# Altium PCB P1_SELF_GD303 V1.1.PcbDoc (part 2 of 2)
Units mm, origin at the board's own origin, x right, y up, seen from the top; angles counter-clockwise.
Board outline 113.1 x 59.11 mm, 2 copper layers (Top layer, Bottom layer), stack 1.171 mm thick; 160 components, 103 nets, 482 pads, 705 vias.
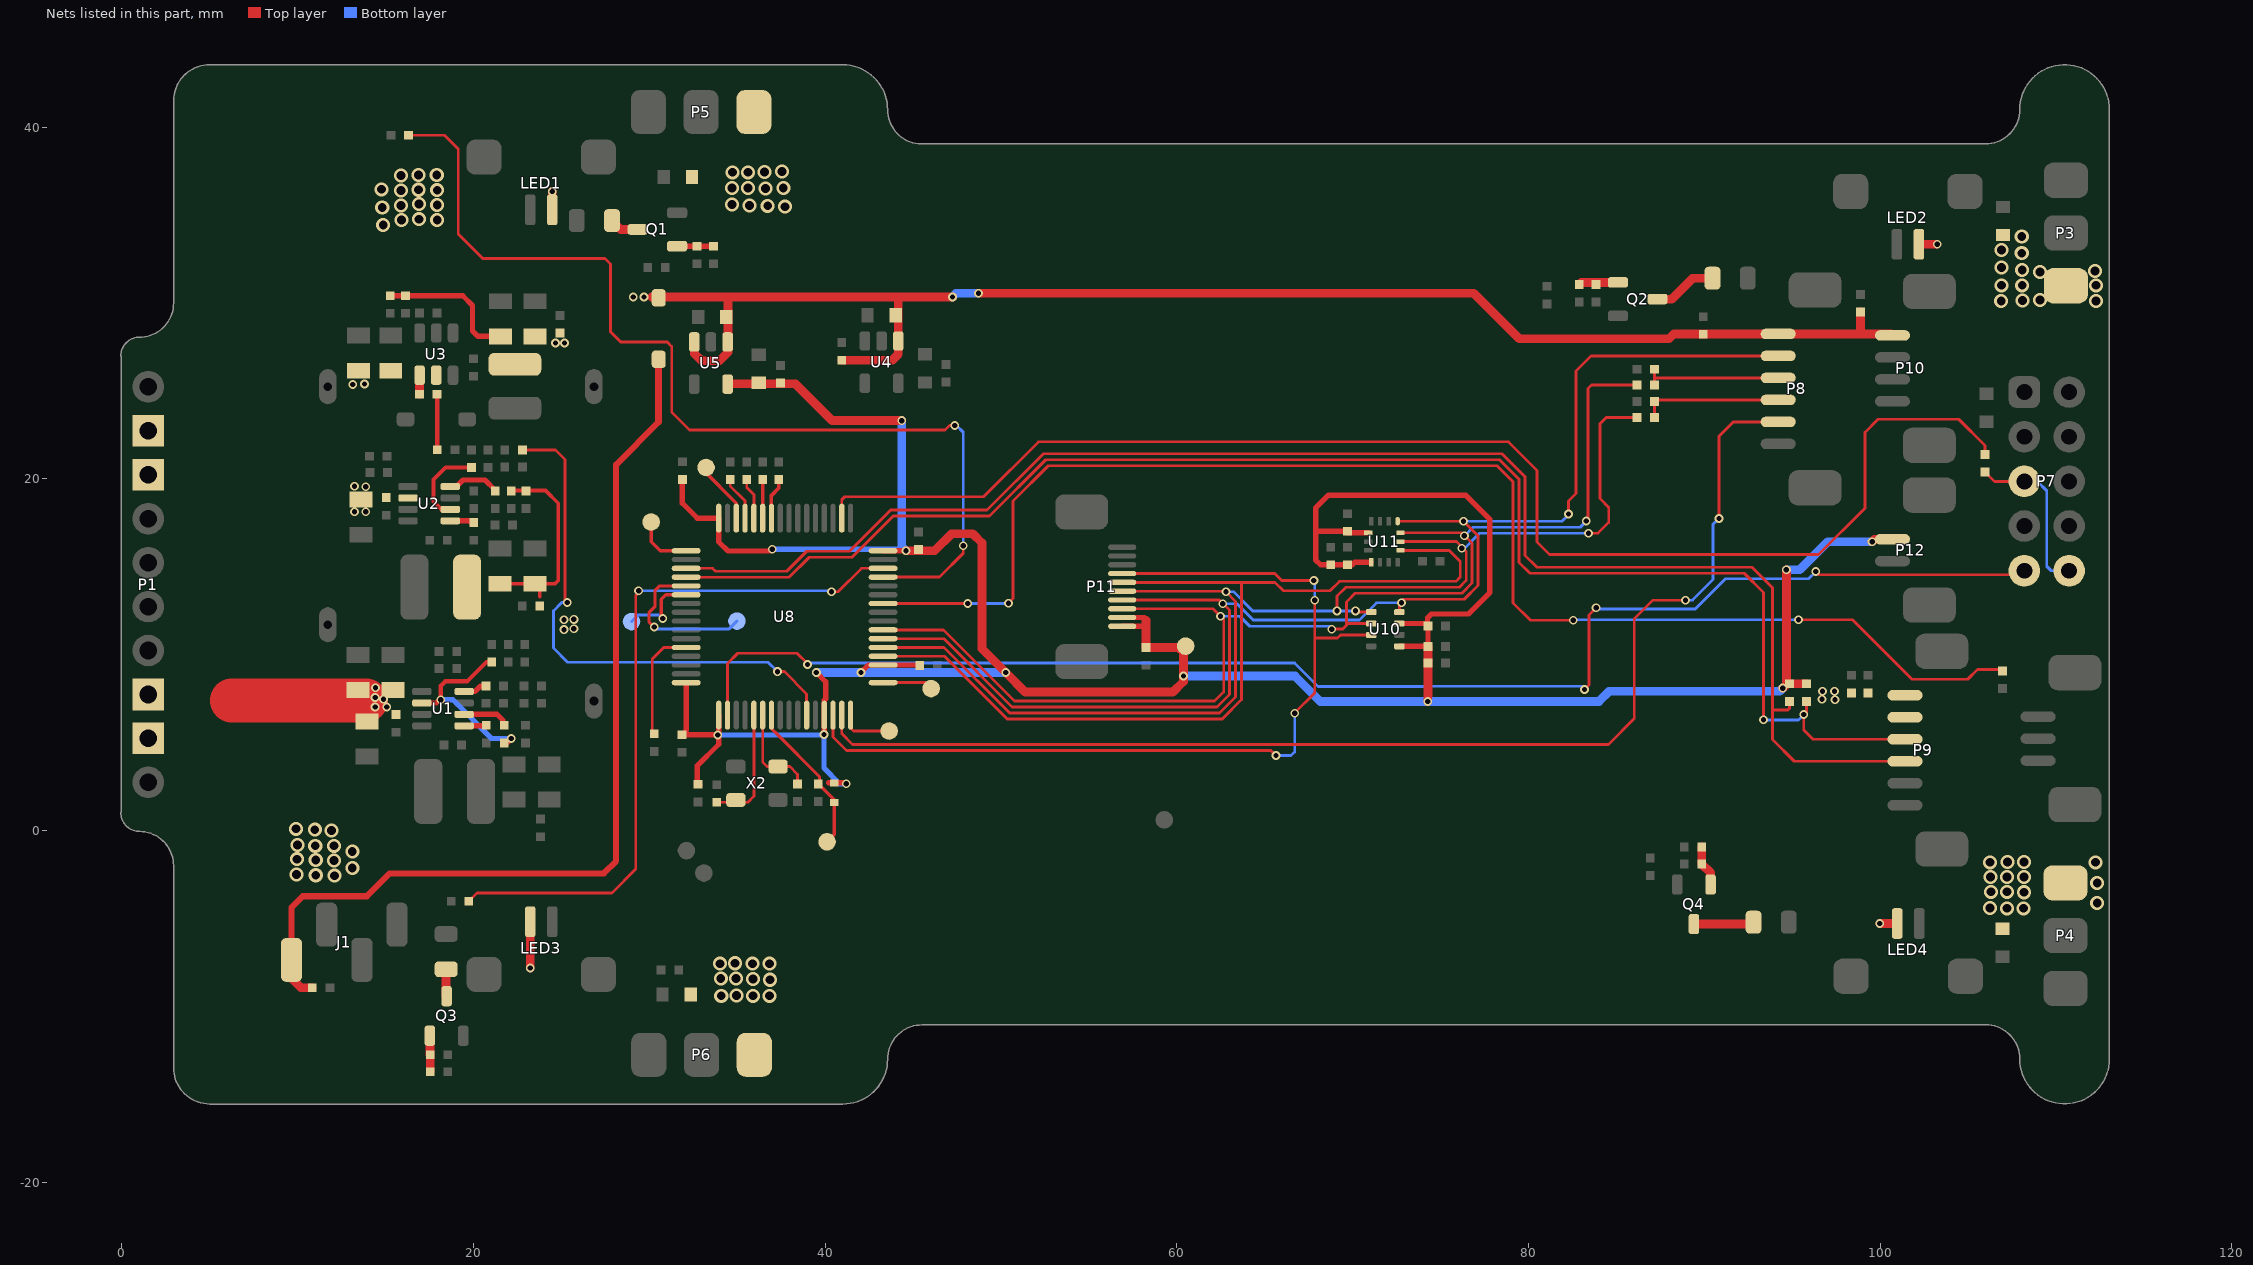
[diagram p2: the nets of this part, all layers, seen from the top]

## Via types
v1: diameter 0.5, hole 0.3, Top layer to Bottom layer, tented both sides, 565 vias
v2: diameter 0.8, hole 0.5, Top layer to Bottom layer, tented both sides, 140 vias

## Nets (pads, with @x,y where several pads share a name; then routed paths per layer and width w, separated by ;. In a path a pad name is that pad's centre, name@x,y a point inside that pad or via, vN(x,y) a via of type N, cw(c..) or ccw(c..) an arc to the next point about the centre after c; other vN are vias at no path point) (continued)
NetP8_3: P8.3 R61.1 R63.1 | length 7.9
  Top layer w0.16: R61.1@87.165,25.349 R63.1@87.165,26.238 ; 87.2,25.746 P8.3@94.2,25.746
NetP8_4: P8.4 R62.1 R64.1 | length 8
  Top layer w0.16: R62.1@87.165,23.495 R64.1@87.165,24.409 87.251,24.496 P8.4@94.2,24.496
NetQ1_1: Q1.1 R36.2 R37.2 | length 2.1
  Top layer w0.3: Q1.1@31.58,33.238 32.722,33.238 R37.2@32.722,33.241 ; R37.2@32.715,33.241 R37.2@32.722,33.241 ; R36.2@33.655,33.241 R37.2@32.722,33.241
NetQ1_3: Q1.3 R35.1 | length 1.7
  Top layer w0.5: R35.1@27.873,34.696 28.381,34.188 Q1.3@29.33,34.188
NetQ2_1: Q2.1 R39.2 R40.2 | length 2.3
  Top layer w0.5: R39.2@82.88,31.056 83,31.176 Q2.1@85.083,31.176
NetQ2_3: Q2.3 R38.1 | length 3.6
  Top layer w0.5: Q2.3@87.333,30.226 88.138,30.226 89.332,31.42 R38.1@90.465,31.42
NetQ3_1: Q3.1 R42.2 R43.2 | length 2.1
  Top layer w0.5: Q3.1@17.516,-11.666 17.516,-12.733 R43.2@17.534,-12.751 R42.2@17.534,-13.716
NetQ3_3: Q3.3 R41.1 | length 1.5
  Top layer w0.5: R41.1@18.44,-7.883 18.44,-9.391 Q3.3@18.466,-9.416
NetQ4_1: Q4.1 R44.2 R46.2 | length 2.3
  Top layer w0.5: R44.2@89.857,-0.94 R46.2@89.857,-1.905 90.358,-2.406 Q4.1@90.358,-3.066
NetQ4_3: Q4.3 R45.1 | length 3.4
  Top layer w0.5: Q4.3@89.408,-5.316 92.693,-5.316 R45.1@92.802,-5.207
NetR3_1: R3.1 U1.6 | length 2.6
  Top layer w0.3: U1.6@19.463,6.609 19.463,6.617 21.323,6.617 21.666,6.274 R3.1@21.666,6.063
NetR5_1: R5.1 U1.5 | length 1.3
  Top layer w0.3: U1.5@19.463,5.959 20.699,5.959 R5.1@20.726,5.986
NetR6_1: R6.1 U1.8 | length 1.4
  Top layer w0.3: U1.8@19.463,7.909 20.076,7.909 20.396,8.23 R6.1@20.701,8.23
NetR9_1: R9.1 U2.6 | length 4.8
  Top layer w0.22: U2.6@18.675,18.268 18.181,18.268 17.729,18.72 17.729,19.964 18.415,20.65 R9.1@19.888,20.65
NetR11_1: R11.1 U2.5 | length 1.3
  Top layer w0.3: U2.5@18.675,17.618 19.763,17.618 R11.1@19.914,17.467
NetR12_1: R12.1 U2.8 | length 3
  Top layer w0.3: U2.8@18.675,19.568 19.034,19.568 19.406,19.939 20.65,19.939 21.234,19.355 R12.1@21.234,19.321
NetR15_1: R15.1 U3.4 | length 1.1
  Top layer w0.5: R15.1@16.924,24.816 16.932,24.823 U3.4@16.932,25.902
NetR28_2: R28.2 U8.60 | length 6.5
  Top layer w0.16: R28.2@30.277,5.504 30.165,5.615 30.165,9.767 30.815,10.417 U8.60@32.094,10.417
NetR29_1: R29.1 U8.34 | length 79.3
  Top layer w0.16: U8.34@40.944,17.767 40.944,18.82 41.113,18.989 49.001,18.989 52.123,22.112 78.853,22.112 80.481,20.484 80.481,16.42 81.204,15.697 96.495,15.697 99.13,18.333 99.13,22.651 99.873,23.393 104.47,23.393 105.969,21.895 R29.1@105.969,21.396
NRST: C52.1 R25.2 T5.0 U8.7 | length 8.9
  Top layer w0.18: U8.7@36.944,6.567 36.944,5.798 37.27,5.472 37.277,5.472 39.675,3.073 39.675,2.735 C52.1@39.599,2.659 40.513,1.745 R25.2@40.513,1.599 40.513,-0.229 T5.0@40.107,-0.635
OSC_I: C50.1 U8.5 X2.3 | length 6.9
  Top layer w0.16: C50.1@33.833,1.608 35.594,1.608 35.944,1.958 U8.5@35.944,6.567
OSC_O: C51.1 U8.6 X2.1 | length 5.5
  Top layer w0.16: U8.6@36.444,6.567 36.444,3.892 36.693,3.642 37.988,3.642 38.43,3.2 C51.1@38.43,2.659
PWM_SERVO: R30.1 U8.26 | length 79.5
  Top layer w0.16: U8.26@43.294,12.917 v1(48.108,12.917) ; v1(50.419,12.929) 50.689,13.199 50.689,18.754 52.687,20.752 78.212,20.752 79.121,19.843 79.121,12.954 80.112,11.963 v1(82.55,11.963) ; v1(95.352,11.989) 98.425,11.989 101.803,8.611 104.978,8.611 105.539,9.171 106.873,9.171 R30.1@106.959,9.085
  Bottom layer w0.16: v1(48.108,12.917) 50.407,12.917 v1(50.419,12.929) ; v1(82.55,11.963) 82.575,11.989 v1(95.352,11.989)
SPI0_MISO: P8.2 P11.4 U8.22 U10.5 U11.1 | length 83.2
  Top layer w0.16: U8.22@43.294,10.917 46.743,10.917 50.634,7.026 62.283,7.026 63.002,7.745 63.002,12.538 62.421,13.118 P11.4@56.891,13.118 ; U11.1@72.556,17.596 v1(76.308,17.596) 77.134,16.77 77.134,13.942 76.349,13.157 72.898,13.157 72.657,12.916 U10.5@72.657,12.43 ; v1(82.271,18.009) 82.271,18.745 82.702,19.177 82.702,26.137 83.561,26.996 P8.2@94.2,26.996
  Bottom layer w0.16: v1(62.611,12.903) 63.426,12.903 64.342,11.987 70.381,11.987 71.349,12.954 v1(72.771,12.954) ; v1(76.308,17.596) 81.909,17.596 82.271,17.958 v1(82.271,18.009)
SPI0_MOSI: P11.3 R61.2 U8.23 U10.3 U11.14 | length 73.6
  Top layer w0.16: U8.23@43.294,11.417 46.724,11.417 50.775,7.366 62.142,7.366 62.662,7.886 62.662,12.014 v1(62.484,12.192) 62.058,12.618 P11.3@56.891,12.618 ; v1(68.809,11.455) 68.824,11.47 69.433,11.47 69.645,11.682 69.645,13.003 70.139,13.497 76.208,13.497 76.794,14.083 76.794,16.348 76.198,16.944 72.728,16.944 U11.14@72.718,16.934 ; 69.645,11.78 U10.3@71.057,11.78 ; v1(83.287,17.602) 83.382,17.698 83.382,25.146 83.586,25.349 R61.2@86.165,25.349
  Bottom layer w0.16: v1(62.484,12.192) 63.576,12.192 64.147,11.621 v1@68.809,11.621 ; v1(76.352,16.764) 76.845,17.256 82.941,17.256 v1(83.287,17.602)
SPI0_NSS_CP: P8.5 U8.15 | length 70.1
  Top layer w0.16: U8.15@40.944,6.567 40.944,5.513 41.552,4.904 84.553,4.904 86.008,6.359 86.008,12.04 87.075,13.106 v1(88.925,13.106) ; v1(90.83,17.755) 90.83,22.428 91.648,23.246 P8.5@94.2,23.246
  Bottom layer w0.16: v1(88.925,13.106) 89.332,13.106 90.5,14.275 90.5,17.424 v1(90.83,17.755)
SPI0_NSS_IMU: P11.6 U8.20 U11.12 | length 53.2
  Top layer w0.16: U8.20@43.294,9.917 46.782,9.917 50.352,6.346 62.582,6.346 63.682,7.446 63.682,14.064 ; P11.6@56.891,14.118 65.587,14.118 66.067,13.638 68.707,13.638 69.246,14.177 75.87,14.177 76.114,14.421 76.114,15.301 75.491,15.924 72.728,15.924 U11.12@72.718,15.934
SPI0_NSS_QY: P11.7 U8.14 U10.2 | length 53.7
  Top layer w0.16: U8.14@40.444,6.567 40.444,5.327 41.207,4.564 65.337,4.564 v1(65.634,4.267) v1@65.684,4.216 ; P11.7@56.891,14.618 65.568,14.618 65.962,14.224 v1(67.793,14.224) ; v1(66.7,6.68) 67.843,7.823 67.843,11.938 ; v1(67.843,13.106) 67.843,11.938 ; U10.2@71.057,11.13 69.318,11.13 69.133,10.945 67.845,10.945 67.845,11.936 67.843,11.938
  Bottom layer w0.16: v1(65.634,4.267) 66.497,4.267 66.7,4.47 v1(66.7,6.68) ; v1(67.793,14.224) 67.843,14.173 v1(67.843,13.106)
SPI0_SCK: P11.5 R62.2 U8.21 U10.4 U11.13 | length 74
  Top layer w0.16: U8.21@43.294,10.417 46.762,10.417 50.493,6.686 62.424,6.686 63.342,7.604 63.342,13.036 v1(62.789,13.589) 62.759,13.618 P11.5@56.891,13.618 ; v1(69.113,12.497) 69.113,13.335 69.616,13.837 76.067,13.837 76.454,14.224 76.454,15.875 75.895,16.434 U11.13@72.718,16.434 ; v1(70.155,12.497) 70.221,12.43 U10.4@71.057,12.43 ; v1(83.414,16.916) 83.947,16.916 84.559,17.528 84.559,18.388 84.062,18.884 84.062,23.139 84.418,23.495 R62.2@86.165,23.495
  Bottom layer w0.16: v1(62.789,13.589) 63.221,13.589 64.313,12.497 v1(69.113,12.497) v1(70.155,12.497) ; v1(76.2,16.053) 76.362,16.053 77.226,16.916 v1(83.414,16.916)
SWCLK: T4.0 U8.49 | length 3.3
  Top layer w0.2: T4.0@30.099,17.551 30.099,16.434 30.616,15.917 U8.49@32.094,15.917
SWDIO: T3.0 U8.46 | length 3.4
  Top layer w0.2: T3.0@33.147,20.422 34.944,18.625 U8.46@34.944,17.767
UART0_RX: R51.1 U8.43 | length 2.2
  Top layer w0.2: U8.43@36.444,17.767 36.444,19.967 R51.1@36.449,19.972
UART0_TX: R52.1 U8.42 | length 2.4
  Top layer w0.2: U8.42@36.944,17.767 36.944,19.062 37.363,19.482 R52.1@37.363,19.972
UART1_RX: T6.0 U8.16 | length 3
  Top layer w0.16: U8.16@41.444,6.567 41.444,5.826 41.605,5.664 T6.0@43.637,5.664
UART1_TX: T11.0 U8.17 | length 2.9
  Top layer w0.16: U8.17@43.294,8.417 45.685,8.417 T11.0@46.025,8.077
UART2_RX: R2.2 U8.30 | length 40.6
  Top layer w0.16: R2.2@19.728,-4.013 20.188,-3.553 27.865,-3.553 29.226,-2.192 29.226,13.376 29.413,13.564 29.388,13.589 v1(29.388,13.64) ; v1(40.361,13.589) 40.742,13.589 42.069,14.917 U8.30@43.294,14.917
  Bottom layer w0.16: v1(29.388,13.64) 40.31,13.64 v1(40.361,13.589)
UART2_TX: R1.2 U8.29 | length 58
  Top layer w0.16: R1.2@16.299,39.548 18.339,39.548 19.126,38.76 19.126,33.934 20.523,32.537 27.483,32.537 27.788,32.233 27.788,28.372 28.372,27.788 31.013,27.788 31.267,27.534 31.267,23.8 32.283,22.784 46.812,22.784 47.066,23.038 v1(47.371,23.038) ; U8.29@43.294,14.417 46.497,14.417 47.854,15.773 v1(47.854,16.205)
  Bottom layer w0.16: v1(47.371,23.038) 47.473,23.038 47.854,22.657 v1(47.854,16.205)
UART3_RX: P9.3 R57.1 U8.52 | length 87.3
  Top layer w0.16: U8.52@32.094,14.417 32.103,14.408 37.95,14.408 39.093,15.551 41.531,15.551 43.868,17.887 49.341,17.887 52.546,21.092 78.353,21.092 79.461,19.984 79.461,15.256 80.082,14.634 88.29,14.634 88.292,14.636 92.272,14.636 93.37,13.538 v1(93.37,6.299) ; R57.1@95.809,7.349 95.809,6.756 v1(95.656,6.604) 95.656,5.715 96.174,5.197 P9.3@101.414,5.197
  Bottom layer w0.16: v1(93.37,6.299) 95.352,6.299 v1(95.656,6.604)
UART3_TX: P9.4 R58.1 U8.51 | length 88.5
  Top layer w0.16: U8.51@32.094,14.917 33.597,14.917 33.766,14.748 37.809,14.748 38.952,15.891 41.39,15.891 43.727,18.227 49.201,18.227 52.405,21.432 78.494,21.432 79.801,20.124 79.801,15.652 80.479,14.974 88.149,14.974 88.151,14.976 92.72,14.976 93.88,13.816 93.88,6.858 ; R58.1@94.844,7.349 94.844,6.96 94.742,6.858 93.88,6.858 ; P9.4@101.414,3.947 95.113,3.947 93.878,5.182 93.878,6.086 93.88,6.088 93.88,6.858
UART4_RX: T9.0 U8.54 | length 4.5
  Top layer w0.18: v1(30.759,12.065) 30.673,12.151 30.673,13.152 30.938,13.417 U8.54@32.094,13.417
  Bottom layer w0.18: T9.0@28.981,11.887 29.362,12.268 30.683,12.268 v1@30.709,12.243
UART4_TX: T10.0 U8.53 | length 9.2
  Top layer w0.18: v1(30.277,11.582) 29.972,11.887 29.972,12.38 30.313,12.721 30.313,13.651 30.579,13.917 U8.53@32.094,13.917
  Bottom layer w0.18: v1(30.277,11.582) 30.386,11.473 34.536,11.473 T10.0@34.98,11.917
USB-5V: D2.1 J1.1 R18.1 | length 54.5
  Top layer w0.35: J1.1@9.649,-7.35 9.649,-4.372 10.287,-3.734 13.939,-3.734 15.234,-2.438 27.403,-2.438 28.103,-1.738 28.103,20.819 30.531,23.247
  Top layer w0.4: 30.531,23.247 D2.1@30.531,26.8
  Top layer w0.5: J1.1@9.649,-7.35 9.649,-8.405 10.185,-8.941 R18.1@10.828,-8.941
USB_DM: R19.1 U8.44 | length 2.4
  Top layer w0.16: R19.1@35.535,19.972 35.535,19.507 35.944,19.098 U8.44@35.944,17.767
USB_DP: R20.1 U8.45 | length 2.7
  Top layer w0.16: R20.1@34.519,19.914 R20.1@34.595,19.837 ; R20.1@34.595,19.972 R20.1@34.595,19.837 ; U8.45@35.444,17.767 35.444,18.76 34.595,19.609 R20.1@34.595,19.837
VBAT: C1.1 C2.1 C10.1 C11.1 C19.1 C20.1 C63.1 C64.1 C65.1 C66.1 C86.1 C87.1 LED1.2 LED2.2 LED3.2 LED4.2 P1.2 P1.3 P1.8 P1.9 P3.1 P4.1 P5.1 P6.1 R3.2 R15.2 R22.1 R26.2 U1.2 U2.2 U3.5 | length 27.3
  Top layer w0.25: R15.2@17.924,24.816 17.924,21.657 R22.1@17.94,21.641 ; v1(18.136,7.442) 18.136,8.23 18.39,8.484 19.634,8.484 20.734,9.584 R26.2@21.031,9.584
  Top layer w0.3: U1.2@17.063,7.259 17.876,7.259 18.059,7.442 v1(18.136,7.442) ; R3.2@21.742,4.986 21.903,4.986 v1(22.149,5.232)
  Top layer w0.5: v1(23.226,-7.808) LED3.2@23.226,-5.18 ; LED1.2@24.476,35.305 v1(24.476,36.347) ; v1(99.976,-5.282) LED4.2@100.975,-5.282 ; LED2.2@102.2,33.349 v1@103.199,33.349
  Top layer w2.5: 6.248,7.391 13.875,7.391
  Bottom layer w0.3: v1(18.136,7.442) 18.821,7.442 21.031,5.232 v1(22.149,5.232)
  other v1: 14.402,7.036 15.062,7.036 14.884,7.468 14.402,7.569 14.427,8.128 13.233,18.136 13.868,18.136 13.868,19.558 13.233,19.583 13.132,25.375 13.792,25.4 103.251,33.35
  other v2: 34.087,-9.398 35.89,-9.398 36.83,-9.398 34.95,-9.373 36.855,-8.484 35.89,-8.433 34.061,-8.407 34.925,-8.407 34.011,-7.569 35.865,-7.569 36.83,-7.569 34.874,-7.544 107.213,-4.42 108.153,-4.42 106.248,-4.394 112.344,-4.115 108.179,-3.505 106.299,-3.48 107.213,-3.48 112.344,-2.972 106.274,-2.642 107.213,-2.642 108.179,-2.642 12.09,-2.565 11.024,-2.54 9.931,-2.489 13.106,-2.134 106.248,-1.803 112.243,-1.803 107.239,-1.778 108.179,-1.778 12.065,-1.702 11.024,-1.676 9.957,-1.626 13.106,-1.194 10.998,-0.864 12.065,-0.864 9.982,-0.813 11.913,0 10.973,0.051 9.906,0.102 106.883,30.124 112.268,30.124 108.102,30.15 109.093,30.175 106.909,31.013 108.077,31.013 112.268,31.013 109.093,31.775 112.217,31.826 108.077,31.877 106.909,32.029 108.052,32.842 106.909,33.02 108.052,33.782 14.859,34.442 15.9,34.722 17.932,34.722 16.891,34.773 14.808,35.433 37.719,35.484 36.728,35.535 15.875,35.56 35.687,35.56 17.932,35.585 34.696,35.611 16.891,35.636 15.875,36.398 17.932,36.424 16.866,36.449 14.757,36.474 36.601,36.525 34.696,36.551 35.611,36.551 37.617,36.551 15.875,37.262 16.866,37.287 17.907,37.287 34.722,37.44 35.611,37.44 36.551,37.465 37.541,37.49
VCC5V: C22.2 C23.1 C24.2 C25.1 C26.1 C27.1 C77.1 C80.2 D2.2 L3.2 P8.1 P10.1 R16.2 R56.2 U4.1 U5.1 U5.3 | length 94.1
  Top layer w0.3: R16.2@15.265,30.421 19.388,30.421 19.939,29.87 19.939,28.423 20.253,28.108 C24.2@21.539,28.108
  Top layer w0.5: D2.2@30.15,30.35 44.247,30.35 ; U5.3@32.553,27.794 32.553,27.137 32.969,26.721 33.985,26.721 34.468,27.203 34.468,30.175 34.293,30.35 ; R56.2@40.945,26.754 43.823,26.754 44.155,27.087 U4.1@44.155,27.845 44.155,30.267 44.072,30.35 44.247,30.35 ; v1(47.237,30.35) 44.247,30.35 ; v1(48.717,30.556) 76.886,30.556 79.471,27.971 87.991,27.971 88.266,28.246 P8.1@94.2,28.246 98.73,28.246 100.621,28.246 P10.1@100.702,28.164 ; 98.882,28.347 C80.2@98.882,29.497
  Bottom layer w0.5: v1(47.237,30.35) 47.442,30.556 v1(48.717,30.556)
  other v1: 24.663,27.737 25.171,27.737 29.083,30.353 29.693,30.353
VDD3V3: C29.1 C54.1 C55.1 C56.1 C57.1 C58.1 C59.1 C71.1 C72.2 C73.2 C75.2 C76.2 C81.1 C85.1 P11.1 P11.2 P12.1 R25.1 R57.2 R58.2 T1.0 U5.5 U8.1 U8.13 U8.19 U8.32 U8.48 U8.64 U10.6 U10.8 U11.5 U11.8 | length 192
  Top layer w0.3: C59.1@31.877,19.973 31.877,18.618 32.729,17.767 U8.48@33.944,17.767 33.944,16.423 34.468,15.899 36.879,15.899 v1(36.982,16.002) ; U8.64@32.094,8.417 32.094,5.695 C58.1@31.852,5.453 v1@33.944,5.453 ; C57.1@32.868,2.608 32.715,2.761 32.715,3.683 33.944,4.911 v1@33.944,5.453 ; U8.1@33.944,6.567 v1@33.944,5.453 ; v1(39.497,8.992) 40.024,8.465 40.024,7.5 39.944,7.42 U8.13@39.944,6.567 39.944,5.476 v1(39.929,5.461) ; 40.183,2.719 41.147,2.719 v1(41.199,2.667) ; v1(42.037,8.992) 42.139,9.093 42.139,9.115 42.42,9.397 42.442,9.397 42.462,9.417 U8.19@43.294,9.417 C56.1@45.314,9.417 ; U8.32@43.294,15.917 v1(44.593,15.917) ; C54.1@45.347,15.951 C54.1@45.415,16.019 ; P11.1@56.891,11.618 58.242,11.618 ; P11.2@56.891,12.118 58.138,12.118 58.268,11.989 ; C73.2@69.663,16.934 U11.5@70.893,16.934 ; C73.2@69.698,17.026 67.927,17.026 67.894,16.993 ; U11.8@71.042,15.258 70.122,15.258 69.985,15.121 C75.2@69.698,15.121 C76.2@68.758,15.121 68.166,15.121 67.894,15.392 67.894,16.993 ; U10.8@72.657,10.48 C71.1@74.262,10.48 ; U10.6@72.657,11.78 C72.2@74.232,11.78 ; C72.2@74.252,11.76 74.252,12.098 74.473,12.319 76.581,12.319 77.8,13.538 77.8,17.704 76.425,19.079 68.631,19.079 67.894,18.342 67.894,16.993 ; C71.1@74.278,10.465 C72.2@74.278,11.76
  Top layer w0.5: U5.5@34.453,25.419 38.306,25.419 40.408,23.317 v1(44.348,23.317) ; v1(44.593,15.917) 46.219,15.917 47.187,16.885 48.394,16.885 48.918,16.36 48.918,10.34 v1(50.267,8.992) 51.382,7.876 59.768,7.876 60.376,8.484 60.376,10.135 60.105,10.406 C81.1@58.242,10.406 58.242,11.618 58.242,11.964 ; v1(74.27,7.341) 74.27,7.687 74.278,7.679 C55.1@74.278,9.525 C71.1@74.278,10.465 ; v1(94.463,8.103) 94.709,8.349 R57.2@95.809,8.349 ; v1(94.666,14.834) 94.666,14.517 94.672,14.511 94.672,8.521 R58.2@94.844,8.349 ; v1(99.543,16.434) 99.685,16.576 P12.1@100.702,16.576
  Bottom layer w0.3: v1(33.884,5.436) 39.903,5.436 v1(39.929,5.461) 39.929,3.556 40.818,2.667 v1(41.199,2.667) ; v1(36.982,16.002) 44.508,16.002 v1(44.593,15.917)
  Bottom layer w0.5: v1(39.497,8.992) v1(42.037,8.992) v1(50.267,8.992) ; v1(44.348,23.317) 44.348,16.161 v1@44.508,16.002 ; v1(60.376,8.788) 66.716,8.788 68.158,7.346 84.004,7.346 84.582,7.925 94.285,7.925 v1(94.463,8.103) ; v1(94.666,14.834) 95.428,14.834 97.022,16.428 99.537,16.428 v1(99.543,16.434)
WIFI_5V: C15.1 C16.1 C17.1 C18.1 C78.2 C79.2 L2.2 P9.1 P9.2 R14.2 | length 11.2
  Top layer w0.22: C16.1@21.514,14.037 C17.1@23.495,14.037 24.629,14.037 24.816,14.224 24.816,18.618 24.087,19.347 22.733,19.347 C15.1@22.149,19.347 ; 23.766,13.31 C17.1@23.766,13.766
  other v1: 97.434,7.442 96.698,7.468 96.723,7.925 97.409,7.925 25.146,11.43 25.705,11.481 25.146,11.989 25.705,12.014
WIFI_POWER_CE: R21.2 U8.11 | length 30.6
  Top layer w0.16: R21.2@22.776,21.641 24.663,21.641 25.197,21.107 25.197,13.106 v1(25.324,12.979) ; v1(37.287,9.042) 37.678,9.042 38.944,7.777 U8.11@38.944,6.567
  Bottom layer w0.16: v1(25.324,12.979) 25.019,12.979 24.538,12.499 24.538,10.387 25.349,9.576 36.754,9.576 v1(37.287,9.042)
XN297LCU_CE: P7.9 U8.2 | length 83.3
  Top layer w0.16: U8.2@34.444,6.567 34.444,9.501 35.027,10.084 38.405,10.084 39.014,9.474 v1(38.989,9.449) ; v1(83.185,8.026) 83.439,8.28 83.439,12.268 v1(83.845,12.675) ; v1(96.342,14.732) 96.522,14.552 107.973,14.552 P7.9@108.204,14.783
  Bottom layer w0.16: v1@39.04,9.5 v1(38.989,9.449) 39.065,9.525 66.7,9.525 68.021,8.204 74.056,8.204 74.058,8.206 83.005,8.206 v1(83.185,8.026) ; v1(83.845,12.675) 83.924,12.596 89.482,12.596 91.209,14.324 95.934,14.324 v1(96.342,14.732)
XN297LCU_IRQ: P7.5 P7.10 R29.2 | length 11.1
  Top layer w0.16: R29.2@105.969,20.396 106.502,19.863 P7.5@108.204,19.863 P7.5@108.991,19.863 ; P7.10@110.007,14.783 P7.10@110.744,14.783
  Bottom layer w0.16: P7.5@108.204,19.863 108.941,19.863 109.474,19.329 109.474,15.037 109.728,14.783 P7.10@110.744,14.783
pads on no net: P11.8 U4.4 U5.4 U8.3 U8.4 U8.24 U8.25 U8.28 U8.33 U8.41 U11.2 U11.3 U11.4 U11.9 U11.10

## Polygon pours and split planes (outlines as drawn)
VCC5V on Bottom layer "Top Layer-No Net" (solid, remove dead copper, pour order 60): 24.333,27.94 24.333,27.457 24.409,27.381 25.4,27.381 27.864,27.381 28.169,27.686 28.219,27.737 28.219,28.372 28.219,29.616 28.575,29.972 29.997,29.972 29.997,30.709 27.762,30.709 27.432,30.378 27.432,28.397 27.305,28.27 25.705,28.27 24.435,28.27 24.333,28.169
GND on Bottom layer "Bottom Layer-No Net" (solid, remove dead copper, pour order 75): 7.62,14.173 13.665,14.173 13.792,14.046 13.792,9.754 7.62,9.754
VBAT on Bottom layer "Bottom Layer-No Net" (solid, remove dead copper, pour order 65): 14.072,6.655 14.072,16.586 12.852,17.805 12.852,19.964 12.852,27 12.929,27.076 12.979,27.127 14.275,27.127 14.275,18.618 15.596,17.297 15.596,7.976 15.596,7.163 15.596,6.807 15.443,6.655
VBAT on Bottom layer "Bottom Layer-No Net" (solid, remove dead copper, pour order 62): 9.398,0.279 9.398,-2.769 9.398,-4.877 12.471,-7.95 14.402,-9.881 21.768,-9.881 37.109,-9.881 40.081,-6.909 46.558,-6.909 108.61,-6.909 108.61,-5.08 109.068,-4.623 112.751,-4.623 112.751,-1.346 105.791,-1.346 105.791,-3.861 37.744,-3.861 36.043,-5.563 16.129,-5.563 13.691,-3.124 13.691,-0.025 13.03,0.635 9.398,0.635
VBAT on Bottom layer "Bottom Layer-No Net" (solid, remove dead copper, pour order 61): 14.376,36.601 14.376,33.426 37.658,33.426 39.836,31.217 105.994,31.217 105.994,29.693 113.03,29.693 113.03,32.207 108.915,32.207 108.737,32.385 108.737,34.722 41.478,34.722 39.218,36.982 38.532,37.668 38.227,37.973 15.748,37.973
GND on Bottom layer "Bottom Layer-No Net" (solid, remove dead copper, pour order 50): 0.038,18.517 0.038,18.821 3.01,18.821 3.01,29.336 2.927,29.419 3.013,29.506 3.013,31.877 3.013,42.126 4.244,43.357 4.422,43.536 20.13,43.536 42.583,43.536 43.904,42.215 43.904,40.386 43.904,40.246 45.121,39.029 45.179,38.971 58.405,38.971 112.954,38.971 112.954,35.077 41.872,35.077 38.697,38.252 15.456,38.252 16.777,39.573 13.018,35.814 10.616,33.412 10.616,1.372 8.953,1.372 8.953,-5.194 14.122,-10.363 37.173,-10.363 40.227,-7.309 112.7,-7.309 112.699,-10.99 45.513,-10.99 44.897,-10.99 43.656,-12.231 43.477,-12.41 43.477,-13.49 43.477,-14.016 42.024,-15.469 41.993,-15.5 40.551,-15.5 4.518,-15.5 3.099,-14.081 2.984,-13.966 2.984,-1.608 2.984,-1.264 1.955,-0.236 1.694,0.026 0.752,0.026 1.802,0.026 2.559,-0.731 3.086,-0.204 3.086,3.048 3.086,9.169 2.934,9.322 2.908,9.296 0.8,9.296 0.064,9.296 0.013,9.347
WIFI_5V on Bottom layer "Top Layer-No Net" (solid, remove dead copper, pour order 78): 24.867,12.268 24.867,11.176 24.867,11.151 26.365,9.652 66.713,9.652 67.974,8.28 94.894,8.28 96.037,7.137 97.815,7.137 97.815,7.976 97.612,8.179 95.809,9.982 69.444,9.982 68.123,11.303 27.584,11.303 26.594,12.294 24.867,12.294
DG_5V on Bottom layer "Top Layer-No Net" (solid, remove dead copper, pour order 79): 24.206,1.168 24.206,0.203 24.232,0.178 26.797,0.178 99.466,0.178 103.2,3.912 104.064,4.775 105.791,4.775 105.791,5.766 103.505,5.766 99.06,1.321 25.781,1.321 24.206,1.321
GND on Bottom layer "Bottom 6-No Net 1" (solid, remove dead copper, pour order 55): 10.973,32.004 10.973,3.15 13.868,0.254 14.021,0.102 14.021,-2.896 14.021,-3.099 15.011,-4.089 16.307,-5.385 19.025,-5.385 35.636,-5.385 37.135,-3.886 37.541,-3.48 38.71,-3.48 105.283,-3.48 105.41,-3.353 105.461,-3.302 105.461,-1.803 105.461,-1.168 105.537,-1.092 105.588,-1.041 107.086,-1.041 113.005,-1.041 113.03,-1.016 113.03,29.413 105.791,29.413 105.689,29.515 105.689,30.226 105.689,30.709 105.435,30.963 102.819,30.963 39.624,30.963 37.516,33.071 23.622,33.071 12.04,33.071
GND on Top layer "Top Layer-No Net" (solid, remove dead copper, pour order 56): 14.859,-3.734 14.859,-6.756 15.011,-6.909 15.291,-7.188 16.459,-7.188 16.764,-7.188 16.912,-7.04 16.912,-4.242 17.94,-3.213 18.009,-3.145 18.009,-2.845 15.773,-2.845 15.745,-2.873
VCC5V on Top layer "Top Layer-No Net" (solid, remove dead copper, pour order 63): 28.778,30.658 28.778,30.099 28.778,30.048 28.88,29.947 29.032,29.794 30.963,29.794 31.039,29.87 31.039,30.785 30.963,30.861 30.404,30.861 28.905,30.861 28.804,30.759
VBAT on Top layer "Top Layer-No Net" (solid, remove dead copper, pour order 51): 106.375,34.239 106.375,32.868 106.375,29.82 106.477,29.718 106.528,29.667 112.979,29.667 112.979,32.196 112.991,32.207 112.965,32.233 110.084,32.233 108.915,32.233 108.534,32.614 108.534,34.239
GND on Top layer "Top Layer-No Net" (solid, remove dead copper, pour order 48): 106.375,38.76 106.375,35.357 106.375,35.255 106.553,35.077 106.578,35.052 107.594,35.052 108.102,35.052 108.534,35.484 108.56,35.509 112.674,35.509 113.03,35.509 112.991,35.549 112.991,38.964 106.426,38.964 106.375,38.913
GND on Top layer "Top Layer-No Net" (solid, remove dead copper, pour order 47): 106.401,-6.807 106.401,-10.185 107.213,-10.998 112.725,-10.998 112.965,-10.998 112.991,-11.024 113.03,-10.984 113.03,-7.315 108.179,-7.315 107.671,-6.807
VBAT on Top layer "Top Layer-No Net" (solid, remove dead copper, pour order 46): 105.791,-1.88 105.791,-5.359 106.223,-5.791 106.375,-5.944 107.671,-5.944 107.772,-5.944 108.712,-5.004 109.093,-4.623 113.03,-4.623 113.03,-1.386 112.991,-1.346 105.791,-1.346
VBAT on Top layer "Top Layer-No Net" (solid, remove dead copper, pour order 45): 32.08,37.592 32.08,36.881 32.08,36.754 32.766,36.068 33.731,35.103 36.678,35.103 37.973,35.103 38.227,35.357 38.252,35.382 38.252,36.551 38.252,38.354 38.252,43.231 34.722,43.231 34.722,38.405 34.29,37.973 32.08,37.973
VBAT on Top layer "Top Layer-No Net" (solid, remove dead copper, pour order 43): 31.979,-8.687 31.979,-9.652 31.979,-9.779 32.055,-9.855 32.08,-9.881 33.477,-9.881 33.96,-9.881 34.315,-10.236 34.569,-10.49 34.569,-12.979 34.569,-15.215 34.595,-15.24 38.151,-15.24 38.151,-7.899 37.465,-7.214 37.389,-7.137 35.281,-7.137 33.503,-7.137 31.979,-8.661
GND on Top layer "Bottom Layer-No Net" (solid, remove dead copper, pour order 77): 30.404,-8.915 31.14,-8.915 31.14,-11.481 31.14,-13.564 31.14,-15.215 27.026,-15.215 27.026,-10.617 27.381,-10.262 29.058,-10.262 29.108,-10.211
GND on Top layer "Bottom Layer-No Net" (solid, remove dead copper, pour order 76): 27.33,43.205 27.33,40.513 28.905,38.938 28.905,36.83 31.166,36.83 31.166,43.205
WIFI_5V on Top layer "Bottom Layer-No Net" (solid, remove dead copper, pour order 74): 18.821,15.443 18.821,12.395 18.821,12.167 18.999,11.989 19.05,11.938 20.701,11.938 20.726,11.938 21.946,13.157 22.276,13.487 23.343,13.487 23.47,13.36 23.495,13.335 23.495,12.573 24.003,12.573 24.079,12.649 24.257,12.827 24.257,14.224 24.257,14.554 24.079,14.732 24.054,14.757 20.904,14.757 20.726,14.757 20.549,14.935 20.498,14.986 20.498,15.545 20.498,15.57 20.345,15.723 20.295,15.773 18.821,15.773
VCC5V on Top layer "Bottom Layer-No Net" (solid, remove dead copper, pour order 73): 20.752,28.6 20.752,26.264 20.752,26.06 21.006,25.806 21.031,25.781 23.851,25.781 23.851,27.381 25.451,27.381 25.451,28.321 25.451,28.423 25.273,28.6
NetC21_2 on Top layer "Bottom Layer-No Net" (solid, remove dead copper, pour order 72): 18.542,26.416 18.542,24.257 18.542,23.343 18.694,23.19 18.923,22.962 19.939,22.962 23.317,22.962 23.901,23.546 23.927,23.571 23.927,24.511 23.724,24.714 23.622,24.816 22.2,24.816 20.828,24.816 20.549,25.095 20.447,25.197 20.447,26.06 20.447,26.34 20.371,26.416
VBAT on Top layer "Bottom Layer-No Net" (solid, remove dead copper, pour order 71): 12.776,26.619 12.776,25.273 12.979,25.07 13.005,25.044 13.995,25.044 15.418,25.044 16.002,25.629 15.977,25.654 15.977,26.34 15.977,26.416 16.154,26.594 16.205,26.645 17.297,26.645 17.526,26.416 17.526,25.806 17.526,24.638 17.628,24.536 17.653,24.511 18.085,24.511 18.161,24.511 18.263,24.613 18.288,24.638 18.288,26.06 18.288,26.721 17.653,27.356 14.859,27.356 13.106,27.356 12.776,27.026
NetC14_1 on Top layer "Bottom Layer-No Net" (solid, remove dead copper, pour order 69): 15.799,18.517 17.043,18.517 17.475,18.517 17.653,18.339 17.831,18.161 17.831,16.535 17.831,12.497 17.424,12.09 17.272,11.938 15.977,11.938 15.951,11.938 15.723,12.167 15.723,13.995 15.723,15.773 16.739,16.789 17.018,17.069 17.018,17.805 17.018,17.831 16.866,17.983 16.815,17.983 15.977,17.983 15.748,17.983 15.646,18.085 15.621,18.11 15.621,18.517
VBAT on Top layer "Bottom Layer-No Net" (solid, remove dead copper, pour order 68): 12.852,19.812 12.852,18.085 12.852,18.059 13.056,17.856 13.081,17.831 14.021,17.831 14.859,18.669 16.637,18.669 16.789,18.669 16.891,18.771 16.916,18.796 16.916,19.177 16.866,19.228 15.697,19.228 15.596,19.228 15.392,19.431 14.986,19.837 13.081,19.837 12.878,19.837
NetC5_1 on Top layer "Bottom Layer-No Net" (solid, remove dead copper, pour order 67): 16.51,6.782 16.51,6.401 16.586,6.325 16.637,6.274 17.424,6.274 17.678,6.274 17.755,6.198 17.856,6.096 17.856,4.953 17.856,4.75 17.272,4.166 16.688,4.166 16.485,3.962 16.459,3.937 16.459,1.88 16.459,0.61 16.815,0.254 16.866,0.203 18.11,0.203 18.39,0.203 18.618,0.432 18.847,0.66 18.847,4.724 18.847,6.198 18.263,6.782 18.237,6.807 17.043,6.807 16.535,6.807
DG_5V on Top layer "Bottom Layer-No Net" (solid, remove dead copper, pour order 66): 19.583,3.912 19.583,0.457 19.837,0.203 25.324,0.203 25.375,0.254 25.552,0.432 25.552,2.54 23.012,2.54 21.641,2.54 21.336,2.845 21.311,2.87 21.311,3.531 21.311,3.861 21.082,4.089 21.006,4.166 19.583,4.166
VBAT on Top layer "Bottom Layer-No Net" (solid, remove dead copper, pour order 64): 12.802,8.433 16.078,8.433 16.078,7.899 16.459,7.518 17.374,7.518 17.602,7.518 17.628,7.493 17.653,7.468 17.653,7.112 17.577,7.036 17.551,7.01 16.967,7.01 16.535,7.01 16.383,6.858 15.875,6.35 15.494,6.35 15.392,6.35 14.808,5.766 12.802,5.766
VBAT on Top layer "Bottom Layer-No Net" (solid, remove dead copper, pour order 59): 3.785,9.169 3.785,3.886 3.785,-1.727 4.851,-2.794 5.131,-3.073 13.691,-3.073 13.691,0.229 10.592,3.327 10.592,9.169
VBAT on Top layer "Bottom Layer-No Net" (solid, remove dead copper, pour order 58): 3.962,23.724 3.988,23.749 3.988,26.772 3.988,37.363 4.775,38.151 4.826,38.202 18.085,38.202 18.415,38.202 18.415,33.604 11.735,33.604 10.617,32.487 10.617,22.276 4.013,22.276 3.962,22.225
VBAT on Top layer "Bottom Layer-No Net" (solid, remove dead copper, pour order 53): 0,23.749 7.442,23.749 9.169,23.749 9.296,23.622 10.592,22.327 10.592,4.267 1.143,4.267 0.051,4.267 0,4.318 0,8.738 3.302,8.738 3.327,8.712 3.785,9.169 3.785,18.567 3.277,19.075 0,19.075
WIFI_5V on Top layer "Bottom Layer-No Net" (solid, remove dead copper, pour order 70): 23.47,13.36 23.47,12.217 23.47,12.04 24.232,11.278 24.359,11.151 25.197,11.151 25.832,11.151 25.959,11.278 25.959,12.192 25.806,12.344 25.019,12.344 24.994,12.344 24.689,12.649 24.663,12.675 24.663,13.614 24.663,14.148 24.257,14.554 23.47,14.554
GND on Top layer "Bottom Layer-No Net" (solid, remove dead copper, pour order 54): 0.33,18.745 0.305,18.72 0.305,9.398 0.305,9.373 0.406,9.271 2.972,9.271 3.251,9.55 3.277,9.576 3.277,10.82 3.277,18.339 2.87,18.745
DG_5V on Top layer "Top Layer-No Net" (solid, remove dead copper, pour order 80): 104.318,5.74 104.318,4.801 104.394,4.724 104.419,4.699 106.909,4.699 110.033,4.699 110.033,5.74
GND on Top layer "Bottom 6-No Net 1" (solid, remove dead copper, pour order 41): 28.143,-3.658 28.135,-3.65 20.091,-3.65 19.728,-4.013 19.329,-4.412 19.329,-8.636 19.329,-9.398 19.761,-9.83 19.812,-9.881 26.492,-9.881 28.169,-9.881 28.981,-9.068 28.981,-5.029 28.981,-3.785 28.854,-3.658
GND on Top layer "Bottom 6-No Net 1" (solid, remove dead copper, pour order 44): 102.464,-2.692 102.464,-4.191 102.464,-6.325 102.26,-6.528 102.108,-6.68 97.714,-6.68 97.384,-6.68 97.028,-7.036 96.749,-7.315 96.749,-9.525 96.749,-9.855 97.104,-10.211 97.257,-10.363 105.893,-10.363 105.893,-7.772 105.816,-7.696 104.699,-6.579 104.699,-3.454 104.699,-3.353 104.038,-2.692
GND on Top layer "Bottom 6-No Net 1" (solid, remove dead copper, pour order 49): 19.329,39.903 19.329,33.96 20.295,32.995 20.752,32.537 27.483,32.537 27.534,32.537 27.965,32.106 28.042,32.029 29.591,32.029 29.591,33.376 29.616,33.401 29.591,33.426 23.825,33.426 23.444,33.426 22.733,34.138 22.708,34.163 22.708,36.424 22.733,36.424 22.936,36.627 22.962,36.601 27.407,36.601 27.711,36.601 28.042,36.932 28.092,36.982 28.092,38.811 28.092,39.014 27.711,39.395 27.178,39.929 19.329,39.929
GND on Top layer "Bottom 6-No Net 1" (solid, remove dead copper, pour order 52): 97.104,37.897 97.104,34.214 97.409,33.909 97.511,33.807 102.87,33.807 103.505,33.807 103.708,33.604 103.861,33.452 103.861,32.791 103.861,32.283 103.53,31.953 103.454,31.877 101.321,31.877 94.59,31.877 94.082,31.369 93.878,31.166 93.878,29.261 93.878,29.185 94.132,28.931 94.285,28.778 104.038,28.778 104.394,28.778 105.131,29.515 105.131,34.265 105.131,34.849 105.766,35.484 105.816,35.535 105.816,36.627 105.816,37.871 105.791,37.897
GND on Top layer "Bottom 6-No Net 1" (solid, remove dead copper, pour order 57): 12.065,33.096 10.998,32.029 10.998,16.231 10.998,3.226 12.268,1.956 14.072,0.152 14.072,-1.473 14.072,-3.099 15.545,-4.572 17.196,-6.223 17.196,-12.548 17.196,-14.808 17.551,-15.164 17.602,-15.215 24.308,-15.215 26.162,-15.215 26.264,-15.113 26.264,-10.49 26.264,-10.389 27,-9.652 28.397,-9.652 28.981,-9.068 29.87,-8.179 31.445,-8.179 31.598,-8.179 32.766,-7.01 33.02,-6.756 37.49,-6.756 37.744,-6.756 38.43,-7.442 38.684,-7.696 38.684,-11.76 38.684,-14.986 39.116,-15.418 39.139,-15.441 41.74,-15.441 42.413,-15.441 46.863,-10.991 75.362,-10.991 105.969,-10.991 105.867,-10.889 105.867,-8.661 105.867,-7.493 104.47,-6.096 104.419,-6.045 104.419,-2.896 104.419,-1.372 105.08,-0.711 104.851,-0.94 104.775,-0.94 113.03,-0.94 113.055,-0.914 113.03,-0.889 113.03,29.261 105.41,29.261 104.978,29.693 104.867,29.804 104.867,34.374 104.867,34.585 105.816,35.535 105.791,35.56 105.791,39.009 39.797,39.009 39.192,38.405 39.141,38.354 39.141,36.754 39.141,34.442 33.884,34.442 32.156,36.17 32.131,36.195 28.931,36.195 28.88,36.195 28.092,36.982 28.092,39.014 27.178,39.929 26.568,40.538 26.568,43.5 19.421,43.5 19.202,43.282 19.05,43.129 19.05,37.262 19.05,33.376 18.745,33.071 12.116,33.071
WIFI_5V on Top layer "Bottom 6-No Net 1" (solid, remove dead copper, pour order 42): 96.317,8.56 96.317,7.849 96.317,7.214 96.444,7.087 96.647,6.883 98.222,6.883 99.644,6.883 100.051,6.477 100.508,6.02 101.981,6.02 102.54,6.02 102.768,6.248 102.794,6.274 102.794,7.518 102.794,7.645 102.311,8.128 102.184,8.255 100.457,8.255 97.815,8.255 97.511,8.56 96.368,8.56

## Keep-outs
Keep-Out Layer:
  circle w0.1: c40.991,-12.991 r0.9
  circle w0.1: c40.991,41.009 r0.9
  circle w0.1: c40.991,41.009 r0.9
  circle w0.1: c83.058,2.342 r0.8
  circle w0.1: c71.391,3.509 r0.5
  circle w0.1: c59.723,25.676 r0.8
  circle w0.1: c71.391,24.509 r0.5
  circle w0.1: c110.491,-12.991 r0.9
  circle w0.1: c110.491,41.009 r0.9
  circle w0.1: c41,-13 r0.9
  circle w0.1: c11,-13 r0.9
  circle w0.1: c7,-13 r0.5
  circle w0.1: c41,41 r0.9
  circle w0.1: c11,41 r0.9
  circle w0.1: c7,41 r0.5
  pour cut-out: 70.891,3.509 ccw(c71.391,3.509) 71.391,3.009 ccw(c71.391,3.509) 71.891,3.509 ccw(c71.391,3.509) 71.391,4.009 ccw(c71.391,3.509)
  lines w0.1: 58,-11 45.5,-11 ccw(c45.5,-13) 43.5,-13 cw(c41,-13) 41,-15.5 5,-15.5 cw(c5,-13.5) 3,-13.5 3,-2 ccw(c1,-2) 1,0 cw(c1,1) 0,1 0,27 cw(c1,27) 1,28 ccw(c1,30) 3,30 3,41.5 cw(c5,41.5) 5,43.5 41,43.5 cw(c41,41) 43.5,41 ccw(c45.5,41) 45.5,39 58,39 ; -0.009,1.009 ccw(c0.991,1.009) 0.991,0.009 cw(c0.991,-1.991) 2.991,-1.991 2.991,-13.491 ccw(c4.991,-13.491) 4.991,-15.491 40.991,-15.491 ccw(c40.991,-12.991) 43.491,-12.991 cw(c45.491,-12.991) 45.491,-10.991 105.991,-10.991 cw(c105.991,-12.991) 107.991,-12.991 ccw(c110.491,-12.991) 112.991,-12.991 112.991,41.009 ccw(c110.491,41.009) 107.991,41.009 cw(c105.991,41.009) 105.991,39.009 45.491,39.009 cw(c45.491,41.009) 43.491,41.009 ccw(c40.991,41.009) 40.991,43.509 4.991,43.509 ccw(c4.991,41.509) 2.991,41.509 2.991,30.009 cw(c0.991,30.009) 0.991,28.009 ccw(c0.991,27.009) -0.009,27.009 -0.009,1.009
  lines w0.254: 0.422,-20.779 0.422,-20.271 ; 1.945,-21.034 0.422,-20.525 ; 1.946,-20.018 0.422,-20.525 ; 46.818,-20.56 0.422,-20.525 ; 66.929,-20.575 113.325,-20.61 ; 111.8,-21.117 113.325,-20.61 ; 111.801,-20.101 113.325,-20.61 ; 113.325,-20.864 113.325,-20.356 ; 117.475,-14.122 117.983,-15.646 ; 117.475,41.955 117.983,43.479 ; 117.729,-15.646 118.237,-15.646 ; 117.729,43.479 118.237,43.479 ; 117.983,5.258 117.983,-15.646 ; 117.983,22.575 117.983,43.479 ; 118.491,-14.122 117.983,-15.646 ; 118.491,41.955 117.983,43.479
  text "59.1255 (mm)" at 118.897,5.512 h1.52 r90
  text "112.90303 (mm)" at 47.071,-21.474 h1.52 r359.96

## Other copper
Top layer:
  pour cut-out: 20.574,25.781 20.549,25.756 20.549,25.095 24.079,25.095 24.13,25.044 24.206,25.121 24.206,25.781
  pour cut-out: 17.958,12.141 17.983,12.116 18.644,12.116 18.644,15.646 18.694,15.697 18.618,15.773 17.958,15.773
  pour cut-out: 18.872,0.559 18.898,0.533 19.558,0.533 19.558,4.064 19.609,4.115 19.533,4.191 18.872,4.191
Bottom layer:
  rectangle net VBAT: 0.305,4.242 2.692,8.738
  rectangle net VBAT: 0.305,19.101 2.642,23.749

## Silkscreen, mask and mechanical layers (free items; w line width, h text height)
Top Overlay:
  circle w0.1: c6.991,41.009 r0.5
  circle w0.1: c10.991,41.009 r0.9
  circle w0.1: c10.991,41.009 r0.9
  circle w0.1: c10.991,41.009 r2
  circle w0.1: c40.991,41.009 r2
  circle w0.1: c110.491,41.009 r2
  circle w0.1: c6.991,-12.991 r0.5
  circle w0.1: c10.991,-12.991 r0.9
  circle w0.1: c10.991,-12.991 r0.9
  circle w0.1: c10.991,-12.991 r2
  circle w0.1: c40.991,-12.991 r2
  circle w0.1: c110.491,-12.991 r2
  circle w0.2: c11,41 r2
  circle w0.2: c41,41 r2
  circle w0.2: c11,-13 r2
  circle w0.2: c41,-13 r2
  lines w0.25: 63.891,6.509 63.891,21.509 78.891,21.509 78.891,6.509 63.891,6.509
  lines w1: 11.684,6.579 11.684,8.382
  text "ESC1" at 38.633,39.319 h1 r90
  text "-" at 29.769,38.964 h1.5 r180
  text "PWM1" at 31.572,38.202 h0.8
  text "+" at 37.059,37.998 h1.5 r90
  text "-" at 106.705,36.906 h1.5 r90
  text "+" at 24.003,32.791 h1.5
  text "PWM2" at 106.274,31.877 h0.8 r90
  text "+" at 102.794,31.699 h1.5
  text "+" at 105.74,29.616 h1.5
  text "ESC2" at 108.737,28.296 h1
  text "5V" at 91.288,27.813 h0.8
  text "5V" at 97.942,27.737 h0.8
  text "MISO" at 90.221,26.645 h0.8
  text "TX" at 97.866,26.518 h0.8
  text "MOSI" at 90.246,25.502 h0.8
  text "RX" at 97.993,25.375 h0.8
  text "TX" at 5.537,24.257 h1.5 r90
  text "SCK" at 90.373,24.232 h0.8
  text "G" at 98.222,24.028 h0.8
  text "CS" at 90.754,22.86 h0.8
  text "GPS" at 98.044,22.301 h0.8
  text "G" at 90.983,21.666 h0.8
  text "D" at 32.868,21.539 h0.8
  text "+" at 5.309,20.904 h1.5 r90
  text "C" at 29.896,18.491 h0.8
  text "CP" at 93.04,16.891 h1
  text "3.3V" at 96.037,16.281 h0.8
  text "-" at 5.436,15.748 h1.5 r90
  text "G" at 97.663,14.834 h0.8
  text "TD" at 97.003,12.725 h1
  text "3.3V" at 59.207,11.43 h0.8
  text "-" at 5.334,10.592 h1.5 r90
  text "NSS_IMU" at 65.253,8.814 h0.8
  text "TX1" at 47.701,7.874 h0.8
  text "IMU" at 55.931,6.706 h1
  text "+" at 5.156,5.969 h1.5 r90
  text "5V" at 98.222,5.969 h0.8
  text "PWM" at 105.435,5.842 h0.8
  text "RX1" at 44.552,5.258 h0.8
  text "SENSOR" at 69.418,5.131 h1
  text "RX" at 98.146,4.75 h0.8
  text "5V" at 106.07,4.521 h0.8
  text "TX" at 98.095,3.683 h0.8
  text "G" at 106.426,3.404 h0.8
  text "G" at 98.577,2.464 h0.8
  text "RX" at 5.283,1.448 h1.5 r90
  text "DG" at 105.842,1.194 h1
  text "WIFI" at 96.876,0.203 h1
  text "GND" at 56.134,0.152 h0.8
  text "N" at 40.945,-1.016 h0.8
  text "ESC3" at 108.941,-1.067 h1
  text "CAN0_TX" at 32.868,-1.245 h0.8
  text "+" at 106.045,-2.235 h1.5 r180
  text "CAN0_RX" at 34.061,-2.896 h0.8
  text "+" at 22.657,-4.166 h1.5
  text "+" at 100.355,-4.394 h1.5
  text "PWM3" at 107.848,-4.42 h0.8 r270
  text "-" at 105.08,-9.525 h1.5 r270
  text "+" at 35.357,-9.906 h1.5 r270
  text "USB5V" at 5.664,-10.312 h0.8
  text "DM" at 10.846,-10.414 h0.8
  text "G" at 15.392,-10.414 h0.8
  text "DP" at 12.954,-10.49 h0.8
  text "PWM4" at 31.191,-10.897 h0.8
  text "-" at 28.042,-11.125 h1.5
  text "ESC4" at 27.026,-14.529 h1 r90
Bottom Overlay:
  text "RX4" at 33.452,13.03 h0.8
  text "TX4" at 36.322,12.7 h0.8
Top Solder:
  lines w1: 11.709,5.232 11.709,3.759 16.916,-1.448 25.248,-1.448 26.848,-1.448 26.848,31.547 11.709,31.547 11.709,9.627
Bottom Solder:
  lines w0.6: 26.492,11.252 27.127,10.643 ; 28.702,10.541 30.886,10.541 ; 32.436,10.516 34.468,10.516 ; 36.246,10.516 38.633,10.516 ; 40.03,10.516 42.57,10.516 ; 43.866,10.541 46.66,10.541 ; 47.879,10.49 51.105,10.49 ; 52.68,10.49 55.626,10.49 ; 56.972,10.516 60.096,10.516 ; 61.417,10.541 63.525,10.541 ; 64.592,10.516 66.421,10.516 ; 67.488,10.312 67.539,10.312 68.555,9.296 ; 69.52,9.169 71.857,9.169 ; 73.127,9.144 75.463,9.144 ; 76.759,9.195 79.527,9.195 ; 81.026,9.195 83.287,9.195 ; 84.557,9.22 87.224,9.22 ; 88.519,9.246 91.491,9.246 ; 92.558,9.195 94.666,9.195 ; 95.402,8.941 96.215,8.128
  lines w1: 8.534,11.151 12.294,11.151 ; 8.534,12.929 12.217,12.929 ; 32.004,34.823 35.027,34.823
  lines w2: 5.893,-0.178 5.893,5.664 ; 6.02,10.058 6.02,16.231 ; 6.045,21.234 6.045,27.33 ; 7.874,34.036 7.976,34.036 13.157,39.218 ; 8.611,-6.833 13.081,-11.303 ; 12.065,-4.343 14.554,-6.833 ; 16.281,-12.598 24.054,-12.598 ; 16.485,41.097 23.495,41.097 ; 17.831,-7.569 21.361,-7.569 ; 20.041,35.763 22.911,35.763 ; 25.527,-7.518 29.032,-7.518 ; 25.806,35.763 29.566,35.763 ; 31.039,-12.319 37.592,-12.319 ; 32.131,41.148 37.948,41.148 ; 36.322,-7.772 36.398,-7.772 38.176,-5.994 ; 37.16,35.839 37.211,35.839 ; 37.592,35.839 40.03,33.401 ; 40.894,38.684 40.945,38.684 42.748,36.881 ; 40.996,-9.322 45.466,-9.322 ; 41.504,-5.461 44.983,-5.461 ; 43.866,33.223 51.943,33.223 ; 46.304,36.906 51.994,36.906 ; 48.26,-9.246 52.121,-9.246 ; 48.844,-5.486 52.121,-5.486 ; 55.27,-5.486 58.547,-5.486 ; 55.55,-9.017 58.826,-9.017 ; 56.769,36.83 60.046,36.83 ; 56.871,33.096 60.147,33.096 ; 62.332,-5.537 65.608,-5.537 ; 62.382,-8.865 65.659,-8.865 ; 64.364,33.071 67.64,33.071 ; 64.414,36.805 67.691,36.805 ; 69.723,-5.563 73,-5.563 ; 69.875,-8.915 73.152,-8.915 ; 71.755,33.122 75.032,33.122 ; 71.831,36.779 75.108,36.779 ; 77.927,-5.639 81.204,-5.639 ; 77.978,-8.941 81.255,-8.941 ; 79.858,33.172 83.134,33.172 ; 79.908,36.652 83.185,36.652 ; 85.598,-5.588 88.875,-5.588 ; 85.877,-8.915 89.154,-8.915 ; 87.63,33.198 90.907,33.198 ; 87.63,36.678 90.907,36.678 ; 93.396,-5.537 96.672,-5.537 ; 93.447,-8.915 96.723,-8.915 ; 94.463,33.274 97.739,33.274 ; 94.59,36.678 97.866,36.678 ; 100.762,-5.563 104.038,-5.563 ; 100.889,-8.89 104.165,-8.89 ; 101.371,36.652 104.648,36.652 ; 101.473,33.401 104.75,33.401